# Altium PCB T962a.PcbDoc
Units mil, origin at the board's own origin, x right, y up, seen from the top; angles counter-clockwise.
Board outline 3661.42 x 2757.03 mil, 2 copper layers (Top Layer, Bottom Layer); 75 components, 73 nets, 290 pads, 117 vias.
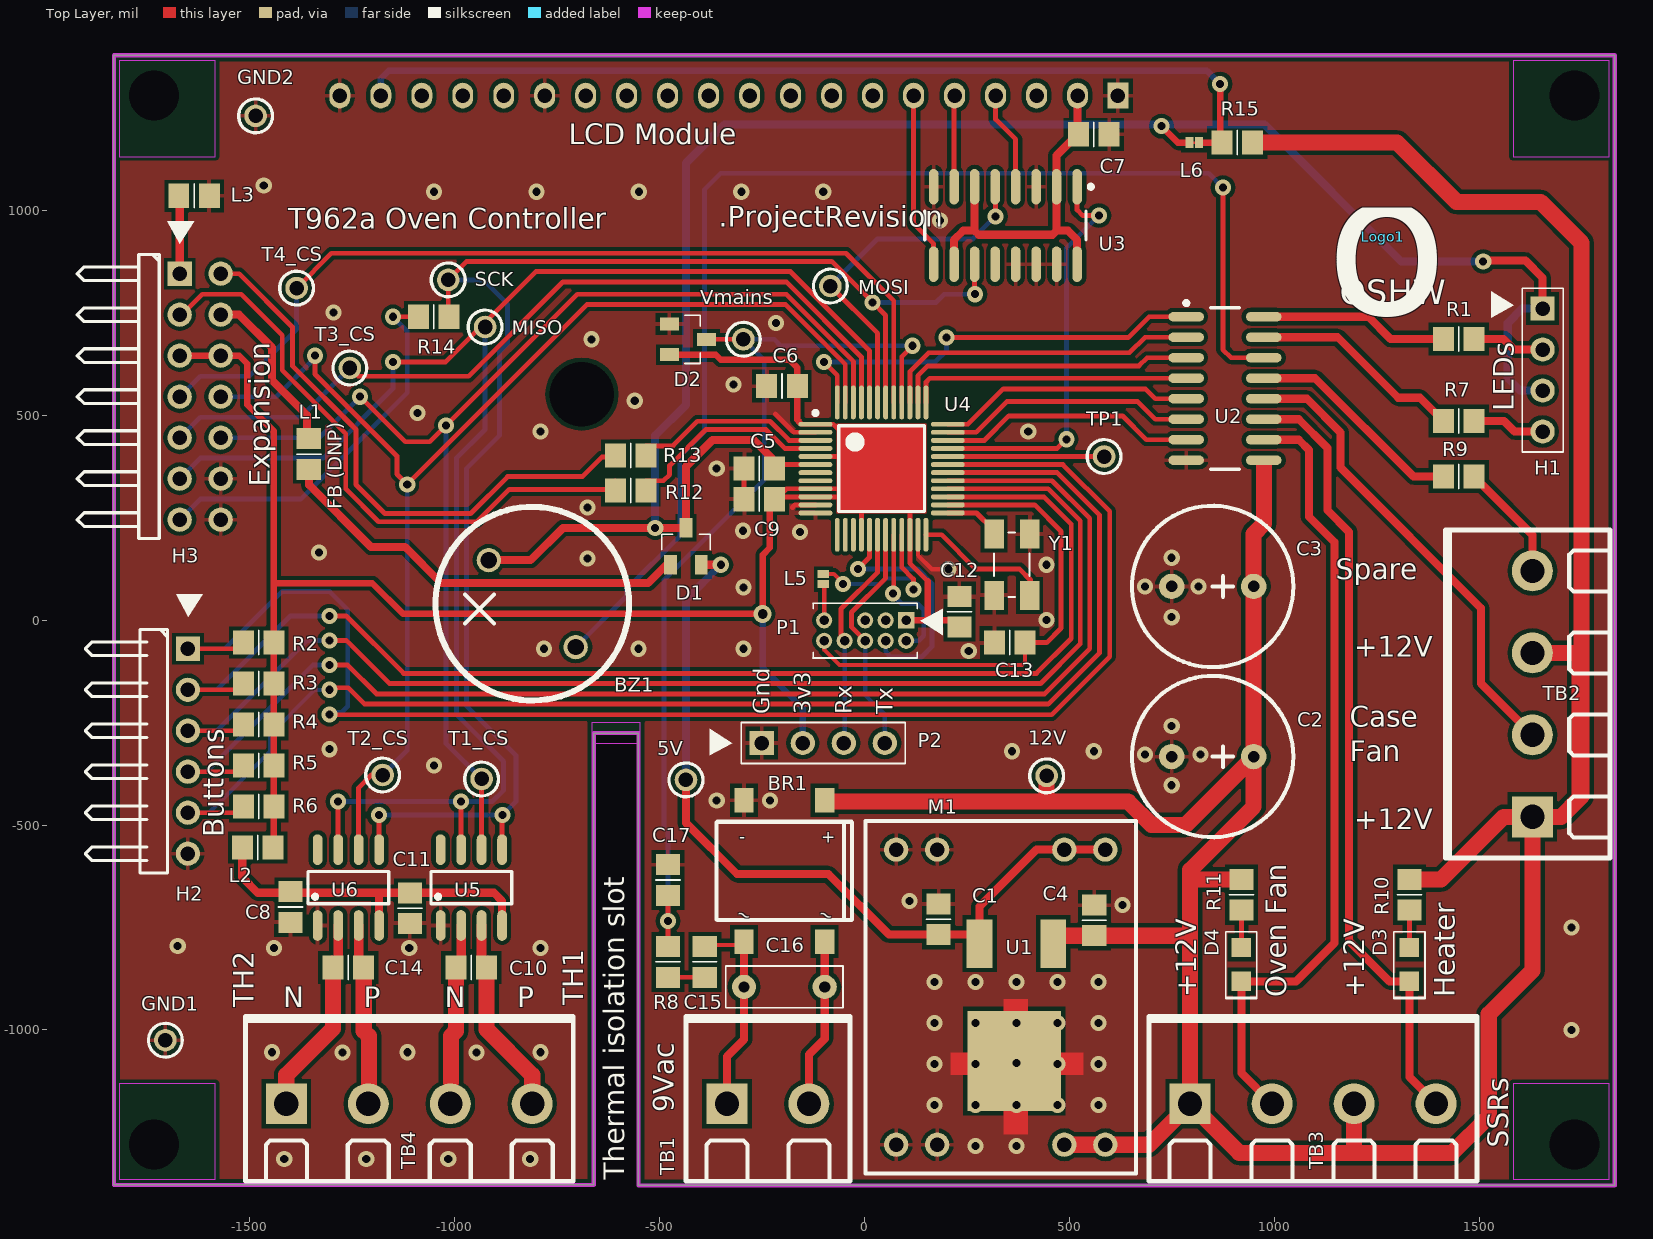
[diagram p0: Top Layer view]
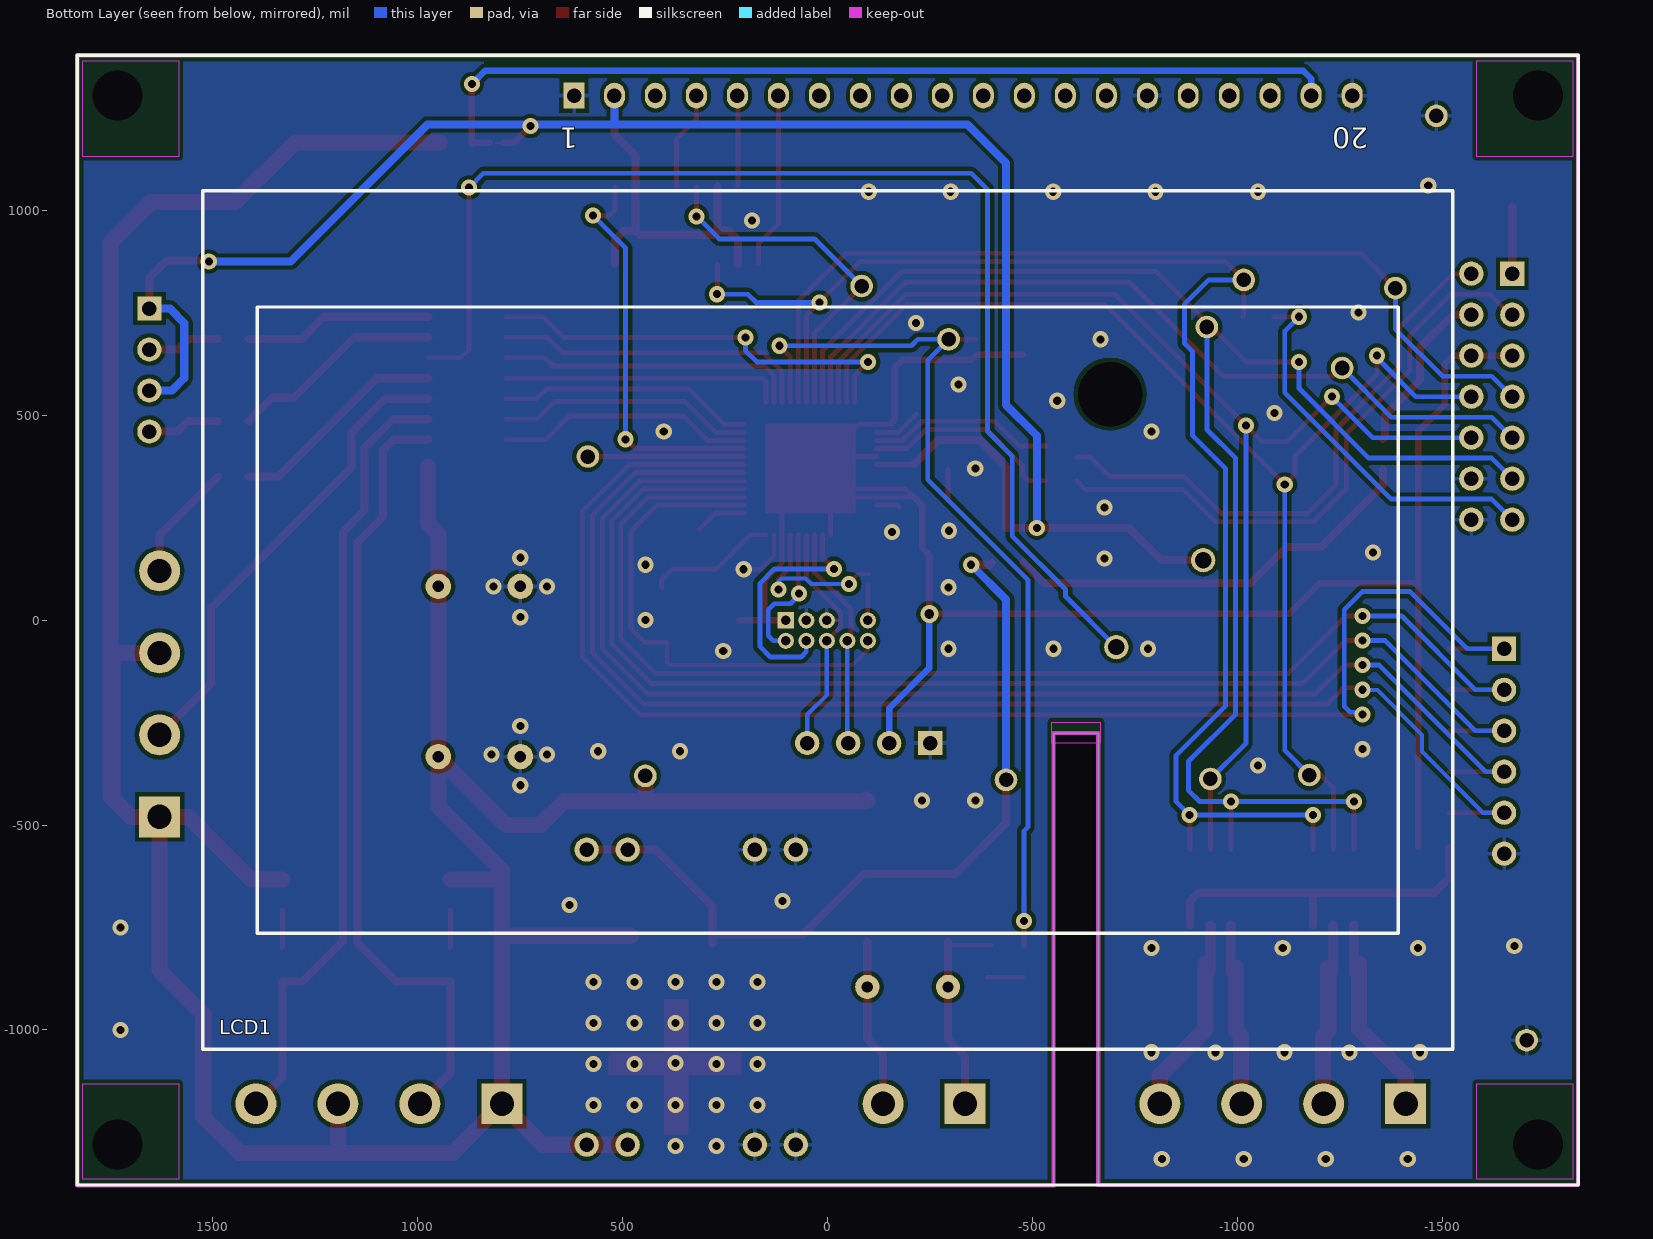
[diagram p1: Bottom Layer view, seen from below]
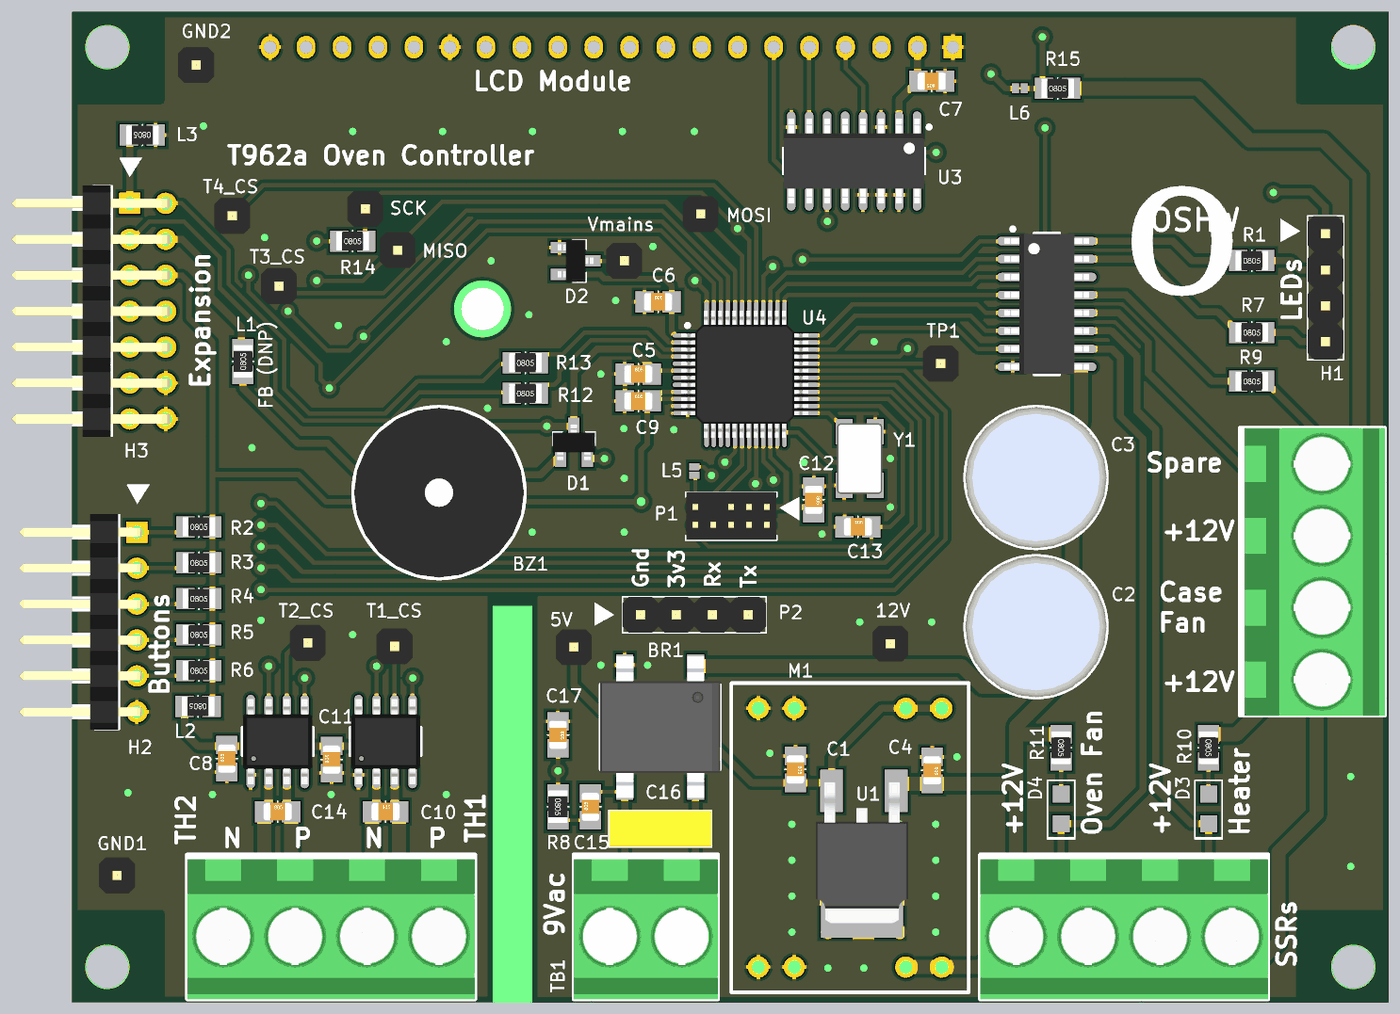
[diagram p2: 3D render of the assembled board from above, using the file's embedded part models]

## Layer stack, top to bottom
Top Solder: solder mask 0.4, Solder Resist, Dk 3.5
Top Layer: signal copper 1.4
Dielectric 1: dielectric 12.6, FR-4, Dk 4.8
Bottom Layer: signal copper 1.4
Bottom Solder: solder mask 0.4, Solder Resist, Dk 3.5

## Board outline
-1830.51,-1377.97 -1830.51,1377.94 1830.91,1377.94 1830.91,-1379.09 -551.18,-1379.09 -551.18,-275.59 -660,-275.59 -660,-1377.97

## Design rules (kind name [scope] priority, off if disabled: settings)
Clearance Clearance_Poly [InPoly] p1: gap=10
Clearance [All] p2: gap=7
HoleSize [All] p1: absolutevalues=TRUE maxlimit=99999 minlimit=1 maxpercent=80.000 minpercent=20.000
MinimumSolderMaskSliver [All] p1 off: minsoldermaskwidth=3.94
PlaneConnect PlaneConnect_Poly [IsVia] p1: planeconnectstyle=Direct reliefexpansion=20 reliefentries=4 reliefconductorwidth=10 reliefairgap=10
PlaneConnect [All] p2: planeconnectstyle=Relief reliefexpansion=20 reliefentries=4 reliefconductorwidth=10 reliefairgap=10
PolygonConnect PolygonConnect_Poly [IsVia] p1: connectstyle=Direct reliefconductorwidth=10 reliefentries=4 polygonreliefangle="90 Angle" airgapwidth=10
PolygonConnect [All] p2: connectstyle=Relief reliefconductorwidth=10 reliefentries=4 polygonreliefangle="90 Angle" airgapwidth=10
RoomDefinition T962a-P1 [InComponentClass('T962a-P1')] p1: confinementstyle=ConfineIn formatcopy=TRUE lockcomponents=FALSE outline -2013,-1417.34 2015,-1417.34 2015,1505.89 -2013,1505.89
RoutingVias [All] p1: holewidth=28 width=50 viastyle="Through Hole" minholewidth=28 minwidth=50 maxholewidth=28 maxwidth=50
SilkToBoardRegionClearance [All] p1 off:
SilkToSilkClearance [All] p1: silktosilkclearance=5
SilkToSolderMaskClearance [IsPad] p1: minsilkscreentomaskgap=7.87 clearancetoexposedcopper=TRUE
SolderMaskExpansion [All] p1: expansion=4
Width [All] p1: maxlimit=40 minlimit=10 preferedwidth=10
24 further rules are at their usual default settings.

## Components (designator, comment, footprint, x,y, rotation, side; value= is the part's Value field where it differs from the comment)
5V "TP" "PCBPIN - 0.9mm" -435,-390 r0 top
12V "TP" "PCBPIN - 0.9mm" 445,-380 r0 top
BR1 "DF10S" BRIDGE-SMT -195,-612 r0 top
BZ1 "Buzzer_PCB" BUZZER_SMALL -810,40 r135 top
C1 "4u7/10V" CCNP2012-0805 181.26,-730.08 r270 top
C2 "470uF/25V" RB5/10x13mm 950,-333 r180 top
C3 "470uF/25V" RB5/10x13mm 950,82 r180 top
C4 "100nF" CCNP2012-0805 561.26,-732.68 r270 top
C5 "100nF" CCNP2012-0805 -255.81,370 r0 top
C6 "2u2F" CCNP2012-0805 -200.79,570.87 r0 top
C7 "100nF" CCNP2012-0805 560,1185 r180 top
C8 "100nF" CCNP2012-0805 -1400,-700 r90 top
C9 "2u2F/6V" CCNP2012-0805 -255.81,295 r0 top
C10 "10nF" CCNP2012-0805 -958.58,-847.66 r0 top
C11 "100nF" CCNP2012-0805 -1108.58,-702.66 r90 top
C12 "100nF" CCNP2012-0805 232,20 r270 top
C13 "100nF" CCNP2012-0805 355,-55 r0 top
C14 "10nF" CCNP2012-0805 -1258.58,-847.66 r0 top
C15 "100nF" CCNP2012-0805 -389,-834 r90 top
C16 "100nF/63Vac" "CAP - SMALL MKT" -195,-895 r0 top
C17 "1nF" CCNP2012-0805 -479,-634 r270 top
D1 "PMEG2005CT" SOT23 -435,180 r0 top
D2 "BAT54S" SOT23 -430,685 r270 top
D3 "LED Red" LED-SMT-2 1330,-840 r270 top
D4 "LED Red" LED-SMT-2 920,-840 r270 top
GND1 "TP" "PCBPIN - 0.9MM" -1705,-1025 r90 top
GND2 "TP" "PCBPIN - 0.9MM" -1485,1230 r90 top
H1 "Header 1x4" HDR1X4S 1655,760 r270 top
H2 "Keyboard" HDR1X6H -1650,-70 r270 top
H3 "2x5 Header" HDR2X7H -1670,845 r270 top
L1 "FB (DNP)" CR2012-0805 -1355,405 r90 top
L2 "FB" CR2012-0805 -1480,-555 r180 top
L3 "FB" CR2012-0805 -1635,1035 r180 top
L5 "LinkOpen" SolderBridge(Open) -100,100 r90 top net-tie
L6 "LinkClosed" SolderBridge(Closed) 805,1165 r180 top net-tie
LCD1 "LCD-XC-4617" LCD_XC-4617 0,0 r0 bottom locked
Logo1 "OSHW Logo" OSHW 1265,935 r0 top
M1 "IT-IM130731001" IT-IM130731001 333,-920 r90 top
MISO "TP" "PCBPIN - 0.9mm" -925,715 r0 top
MOSI "TP" "PCBPIN - 0.9mm" -82.68,814.96 r0 top
P1 "SWD2X5" SWD-2X5 102.32,-0.49 r180 top
P2 "Header 1x4" HDR1X4S -250,-300 r0 top
R1 "390R" CR2012-0805 1450,685.79 r0 top
R2 "4K7" CR2012-0805 -1477.6,-55 r0 top
R3 "4K7" CR2012-0805 -1477.6,-155 r0 top
R4 "4K7" CR2012-0805 -1477.6,-255 r0 top
R5 "4K7" CR2012-0805 -1477.6,-355 r0 top
R6 "4K7" CR2012-0805 -1477.6,-455 r0 top
R7 "390R" CR2012-0805 1450,485.79 r0 top
R8 "47K" CR2012-0805 -479,-834 r270 top
R9 "DNP" CR2012-0805 1450,350 r0 top
R10 "10K" CR2012-0805 1330,-670 r270 top
R11 "10K" CR2012-0805 920,-670 r270 top
R12 "33R" CR2012-0805 -570,316.38 r0 top
R13 "33R" CR2012-0805 -570,401.38 r0 top
R14 "85R" CR2012-0805 -1050,740 r0 top
R15 "1K" CR2012-0805 910,1165 r0 top
SCK "TP" "PCBPIN - 0.9mm" -1015,830 r0 top
T1_CS "TP" "PCBPIN - 0.9mm" -933.58,-387.66 r0 top
T2_CS "TP" "PCBPIN - 0.9mm" -1175,-378 r90 top
T3_CS "TP" "PCBPIN - 0.9mm" -1255,615 r90 top
T4_CS "TP" "PCBPIN - 0.9mm" -1385,810 r90 top
TB1 "Terminal2" MOLEX-39544-3002 -335,-1180 r270 top
TB2 "Terminal4" MOLEX-39544-3004 1630,-480 r0 top
TB3 "Terminal4" MOLEX-39544-3004 795,-1180 r270 top
TB4 "Terminal4" MOLEX-39544-3004 -1410,-1180 r270 top
TP1 "TP" "PCBPIN - 0.9MM" 585,399.04 r0 top
U1 "NCP5501DT50RKG" TO-252 371.26,-932.68 r180 top
U2 "ULN2003ADR" SO-16_N 880,565 r0 top
U3 "74HCT157N" SO-16_N 344.28,962.73 r270 top
U4 "MK22DX256VLF5" TSQFP50P900X900-48M 42.32,369.51 r0 top (schematic designator U?)
U5 "MAX31855KASA+T" SO-8_L -958.58,-652.66 r90 top
U6 "MAX31855KASA+T" SO-8_L -1258.58,-652.66 r90 top
Vmains "TP" "PCBPIN - 0.9mm" -295,685 r0 top
Y1 "ABM3B-8.000MHZ-B2-T" "CRYSTAL_SMT - ABM3B" 360,135 r90 top

## Footprints (in the part's own frame and the unit in brackets; to place one, negate y for a bottom-side part, rotate by r counter-clockwise, add the part's x,y. Pads: shape width x height; smd on the part's side, far side on the other; paste and mask are expansions set on the pad)
BRIDGE-SMT [mm] "Bridge rectifier SMT"
  rect 1.2x1.52 smd: 1(2.5,4.375) 2(-2.5,4.375) 3(-2.5,-4.375) 4(2.5,-4.375)
  silkscreen extent -4.2,-3.05 4.2,3.05, body extent -4.24,-5.01 4.26,4.99, height 2.93
BUZZER_SMALL [mm] "BUZZER -  Adafruit"
  round 1.5 hole 1: 1(-3.81,0) 2(3.81,0)
  silkscreen extent -6,-6 6,6, body extent -5.99,-6 5.99,6, height 10
"CAP - SMALL MKT" [mm] "MKT Polyester block capacitor"
  round 1.5 hole 0.7: 1(-2.5,0) 2(2.5,0)
  silkscreen extent -3.63,-1.3 3.63,1.3, body extent -3.6,-1.25 3.6,1.25, height 6.5
CCNP2012-0805 [mm]
  rect 1.3x1.5 smd: 1(-0.95,0) 2(0.95,0)
  silkscreen extent 0,-0.75 0,0.75, body extent -1,-0.62 1,0.63, height 0.78
CR2012-0805 [mm]
  rect 1.3x1.5 smd: 1(-0.95,0) 2(0.95,0)
  silkscreen extent 0,-0.75 0,0.75, body extent -1.15,-0.67 1.15,0.68, height 0.76
"CRYSTAL_SMT - ABM3B" [mm] "Crystal SMT low profile (5.0 x 3.2 mm)"
  rect 1.8x1.2 smd: 1(-1.9,-1.1) 2(1.9,-1.1) 3(1.9,1.1) 4(-1.9,1.1)
  silkscreen extent -2,-1.1 2,1.1, body extent -2.51,-1.59 2.49,1.61, height 1.15
HDR1X4S [mm] "Connector; Header; 5 Position; Straight"
  rect 1.5x1.5 hole 0.9: 1(0,0)
  round 1.5 hole 0.9: 2(2.54,0) 3(5.08,0) 4(7.62,0)
  silkscreen extent -1.27,-3.18 8.89,1.27, body extent -1.27,-1.27 8.89,1.27, height 6
HDR1X6H [mm] "Connector; Header; 6 Position; Right Angle"
  rect 1.5x1.5 hole 0.9: 1(0,0)
  round 1.5 hole 0.9: 2(2.54,0) 3(5.08,0) 4(7.62,0) 5(10.16,0) 6(12.7,0)
  silkscreen extent -3.38,-6.35 13.89,0.91, body extent -1.27,-8.3 13.97,0.33, height 2.54
HDR2X7H [mm] "Connector; Header; 2x7 Position; Right Angle"
  rect 1.5x1.5 hole 0.9: 1(0,0)
  round 1.5 hole 0.9: 2(0,2.54) 3(2.54,0) 4(2.54,2.54) 5(5.08,0) 6(5.08,2.54) 7(7.62,0) 8(7.62,2.54) 9(10.16,0) 10(10.16,2.54) 11(12.7,0) 12(12.7,2.54) 13(15.24,0) 14(15.24,2.54)
  silkscreen extent -3.24,-6.35 16.41,0.89, body extent -1.27,-8.33 16.51,2.84, height 5.08
IT-IM130731001 [mm] "Buck Converter module"
  round 1.5 hole 0.9: IN0+(-9.144,-3.937) IN0-(-9.144,6.477) IN1+(-9.144,-6.477) IN1-(-9.144,3.937) OUT0+(9.144,-3.937) OUT0-(9.144,6.477) OUT1+(9.144,-6.477) OUT1-(9.144,3.937)
  silkscreen extent -10.92,-8.38 10.92,8.38, body extent -10.92,-8.38 10.92,8.38, height 6
LCD_XC-4617 [mm] "Duinotech XC-4617 128 x 64 LCD"
  round 3 hole 4: 0(-17.5,-14)
  rect 1.3x1.6 hole 0.9: 1(15.72,-32.5)
  oval 1.3x1.6 hole 0.9: 2(13.22,-32.5) 3(10.68,-32.5) 4(8.14,-32.5) 5(5.6,-32.5) 6(3.06,-32.5) 7(0.52,-32.5) 8(-2.02,-32.5) 9(-4.56,-32.5) 10(-7.1,-32.5) 11(-9.64,-32.5) 12(-12.18,-32.5) 13(-14.72,-32.5) 14(-17.26,-32.5) 15(-19.8,-32.5) 16(-22.34,-32.5) 17(-24.88,-32.5) 18(-27.42,-32.5) 19(-29.96,-32.5) 20(-32.5,-32.5)
  round 3 hole 3.1: 21(-44,-32.5) 22(44,-32.5) 23(44,32.5) 24(-44,32.5)
  silkscreen extent -46.5,-35 46.5,35, body extent -46.5,-35 46.5,35, height 11.3
LED-SMT-2 [mm] "Medium SMT LED HSMx-C170 (0805)"
  rect 1.2x1.2 smd: A(-1.05,0) K(1.05,0)
  silkscreen extent -2.03,-0.96 2.13,0.96, body extent -1.78,-0.76 1.78,0.76, height 1
MOLEX-39544-3002 [mm] "Wire-To-Board Terminal Block"
  rect 2.54x2.54 hole 1.5: 1(0,0)
  round 2.54 hole 1.5: 2(0,5.08)
  silkscreen extent -5.4,-2.54 4.83,7.62, body extent -5.08,-2.54 4.83,7.62, height 14.6
MOLEX-39544-3004 [mm] "Wire-To-Board Terminal Block"
  rect 2.54x2.54 hole 1.5: 1(0,0)
  round 2.54 hole 1.5: 2(0,5.08) 3(0,10.16) 4(0,15.24)
  silkscreen extent -5.4,-2.54 4.83,17.78, body extent -5.08,-2.54 4.83,17.78, height 14.6
OSHW [mil] "OSHW Logo"
"PCBPIN - 0.9mm" [mm]
  round 1.4 hole 0.9: 1(0,0)
  silkscreen extent -1.05,-1.05 1.05,1.05, body extent -1.27,-1.27 1.27,1.27, height 6
"PCBPIN - 0.9MM" [mm]
  round 1.4 hole 0.9: 1(0,0)
  silkscreen extent -1.05,-1.05 1.05,1.05, body extent -1.27,-1.27 1.27,1.27, height 6
RB5/10x13mm [mil]
  round 62 hole 28: 1(0,0) 2(200,0)
  silkscreen extent -97,-197 297,197, body extent -97,-197 297,197, height 512
SO-8_L [mm] "8-Pin Small Outline Integrated Circuit 1.27 mm Pitch, IPC High Density"
  oval 1.9x0.6 smd: 1(-2.35,1.905) 2(-2.35,0.635) 3(-2.35,-0.635) 4(-2.35,-1.905) 5(2.35,-1.905) 6(2.35,-0.635) 7(2.35,0.635) 8(2.35,1.905)
  silkscreen extent -1,-2.5 1,2.5, body extent -3,-2.45 3,2.45, height 1.7
SO-16_N [mm] "16-Pin Small Outline Integrated Circuit 1.27 mm Pitch, IPC Medium Density"
  oval 2.2x0.6 smd: 1(-2.4,4.445) 2(-2.4,3.175) 3(-2.4,1.905) 4(-2.4,0.635) 5(-2.4,-0.635) 6(-2.4,-1.905) 7(-2.4,-3.175) 8(-2.4,-4.445) 9(2.4,-4.445) 10(2.4,-3.175) 11(2.4,-1.905) 12(2.4,-0.635) 13(2.4,0.635) 14(2.4,1.905) 15(2.4,3.175) 16(2.4,4.445)
  silkscreen extent -2.52,-5 0.9,5.42, body extent -3,-4.95 3,4.95, height 1.4
SolderBridge(Closed) [mm]
  rect 0.5x0.7 smd: 1(-0.305,0) 2(0.305,0)
  Top Layer region: -0.152,-0.076 0.152,-0.076 0.152,0.076 -0.152,0.076
SolderBridge(Open) [mm]
  rect 0.5x0.7 smd: 1(-0.305,0) 2(0.305,0)
SOT23 [mm] "SOT-23; 3 Leads; Body 3.0 x 2.3 mm, inc. leads (LxW max)"
  rect 0.8x1.2 smd: 1(-0.95,-1.15) 2(0.95,-1.15) 3(0,1.15)
  silkscreen extent -1.5,-0.2 1.5,0.75, body extent -1.5,-1.25 1.5,1.25, height 1.05
SWD-2X5 [mm] "Connector; SWD; 2x5 Position"
  rect 1x1 hole 0.6: 1(0,0)
  round 1 hole 0.6: 2(0,1.27) 3(1.27,0) 4(1.27,1.27) 5(2.54,0) 6(2.54,1.27) 8(3.81,1.27) 9(5.08,0) 10(5.08,1.27)
  silkscreen extent -2.27,-1.06 5.77,2.33, body extent -0.63,-1.09 5.72,2.31, height 4.5
TO-252 [mm] "TO-252 Package"
  rect 1.6x3 smd: 1(-2.285,-3.64) 3(2.285,-3.64)
  rect 5.8x6.2 smd: 4(0.127,3.64)
  body extent -3.14,-4.23 3.4,5.71, height 2.29
TSQFP50P900X900-48M [mm] "Thin QFP, 48-Leads, Body 7x7mm, Pitch 0.5mm, IPC Low Density"
  oval 2.1x0.3 smd: 1(-4.1,2.75) 2(-4.1,2.25) 3(-4.1,1.75) 4(-4.1,1.25) 5(-4.1,0.75) 6(-4.1,0.25) 7(-4.1,-0.25) 8(-4.1,-0.75) 9(-4.1,-1.25) 10(-4.1,-1.75) 11(-4.1,-2.25) 12(-4.1,-2.75) 25(4.1,-2.75) 26(4.1,-2.25) 27(4.1,-1.75) 28(4.1,-1.25) 29(4.1,-0.75) 30(4.1,-0.25) 31(4.1,0.25) 32(4.1,0.75) 33(4.1,1.25) 34(4.1,1.75) 35(4.1,2.25) 36(4.1,2.75)
  oval 0.3x2.1 smd: 13(-2.75,-4.1) 14(-2.25,-4.1) 15(-1.75,-4.1) 16(-1.25,-4.1) 17(-0.75,-4.1) 18(-0.25,-4.1) 19(0.25,-4.1) 20(0.75,-4.1) 21(1.25,-4.1) 22(1.75,-4.1) 23(2.25,-4.1) 24(2.75,-4.1) 37(2.75,4.1) 38(2.25,4.1) 39(1.75,4.1) 40(1.25,4.1) 41(0.75,4.1) 42(0.25,4.1) 43(-0.25,4.1) 44(-0.75,4.1) 45(-1.25,4.1) 46(-1.75,4.1) 47(-2.25,4.1) 48(-2.75,4.1)
  silkscreen extent -4.22,-2.65 2.65,3.57, body extent -4.55,-4.5 4.45,4.5, height 1.6

## Part data
5V 12V GND1 GND2 MISO MOSI SCK T1_CS T2_CS T3_CS T4_CS TP1 Vmains: "Test Point"
BR1: "bRIDGE rECTIFIER"
BZ1: "Buzzer (Adafruit 1536)"
C1 C8 C10 C11 C13 C14: library part Cap_CCNP_0805, "Capacitor SMT 0805"
C2 C3: library part Cap-25ZLS470MEFC10X12, "Polarized Capacitor"
C4 C5 C6 C7 C9 C12 C15 C16 C17: library part Cap, "Capacitor"
D1: "Dual Schottky Diode (SMT)"
D2: "Dual Diode (SMT)"
D3 D4: library part "LED SMT,Red", "LED (Red SMT)"
H1 P2: "Header, 5-Pin, Right Angle"
H2: library part "Header 6", "Header, 6-Pin"
H3: library part "Header 2x7H", "Header 2x7"
L1 L2 L3: library part "Ferrite Bead 0805", "Ferrite Bead (0805) 0.045OHM, 2A"
LCD1: "LCD 128 x 64 pixel, ST7920 controller & contrast pot (Jaycar XC-4617)"
M1: "Itead Buck converter"
P1: "SWD Connector 2x5-Pin"
R1 R2 R3 R4 R5 R6 R7 R8 R9 R10 R11 R12 R13 R14 R15: library part Res_CR0805, "Resistor"
TB1: "MULTICOMP  MC24366 Wire-To-Board Terminal Block"
TB2 TB3 TB4: "MULTICOMP MC24368 Wire-To-Board Terminal Block"
U1: "Fixed LDO Voltage Regulator, 2.5V-16V in, 230mV Dropout, 5V/500mA out, TO-252-3"
U3: "Quad 2-1 Multiplexor"
U4: "Arm Cortex M4"
Y1: "Crystal 8MHz (MINIATURE SMT ABM3B)"

## Via types
v1: diameter 39.37, hole 19.68, Top Layer to Bottom Layer, tented both sides, 116 vias
v2: diameter 43.31, hole 23.62, Top Layer to Bottom Layer, tented both sides, 1 vias

## Nets (pads, with @x,y where several pads share a name; then routed paths per layer and width w, separated by ;. In a path a pad name is that pad's centre, name@x,y a point inside that pad or via, vN(x,y) a via of type N, cw(c..) or ccw(c..) an arc to the next point about the centre after c; other vN are vias at no path point)
3V3: C6.2 C9.2 C12.2 D2.2 H3.5 H3.6 L2.1 P1.1 P2.2 R2.2 R3.2 R4.2 R5.2 R6.2 U4.1 U4.5 U4.9 U4.10 U4.16 U4.22 | length 4867.5
  Top Layer w11.81: -158.08,483.08 -152.78,477.78 U4.1 ; U4.5 -18.15,399.04 ; U4.1@-119.09,477.69 -75.69,477.69 -37.47,439.47 ; -26.89,320.3 U4.9 -189.49,320.3 -209.17,300.61 U4.10 -24.39,300.61 ; U4.16 -6.89,293.11 ; 111.22,318.41 U4.22 111.22,138.78 154.92,95.08
  Top Layer w15.75: H3.5 H3.6 -1525,645 -1505,625 -1505,525 -1440.2,460.2 -1440.2,90 ; L2.1@-1440.2,-552.6 R6.2 R5.2 R4.2 R3.2 R2.2 -1440.2,90 ; D2.2 -362.6,647.6 -350,635 -182.24,635 -163.39,616.14 C6.2 -163.39,488.39 -158.08,483.08 ; C9.2@-209.17,300.61 -230.51,279.28 -230.51,176.4 -248,158.91 v2(-248,15) -1125,15 -1200,90 -1440.2,90 ; P1.1 C12.2@215.09,-0.49 ; 154.92,0 154.92,95.08
  Bottom Layer w15.75: v2(-248,15) -248,-117 -150,-215 P2.2
5V: BZ1.2 C5.2 C7.2 D1.3 H1.1 H1.3 L6.2 LCD1.2 U3.2 U3.6 U3.10 U3.16 U4.6 | length 5689.1
  Top Layer w11.81: C5.2@-200.24,379.35 U4.6
  Top Layer w15.75: v1(725,1205) 765,1165 L6.2
  Top Layer w19.68: BZ1.2 -813.93,146.07 -735,225 v1(-510,225) D1.3@-435.28,225 ; D1.3 -435,375 -370.49,439.51 -269.51,439.51 C5.2@-210.28,380.28 ; U3.10 219.28,927.73 241.54,950 269.28,950 ; U3.6 269.28,950 ; U3.16 519.28,927.73 497.01,950 469.28,950 ; LCD1.2 520.47,1184.79 469.28,1133.59 U3.2 469.28,950 ; v1(1510,875) 1512,877 1613,877 1655,835 ; 269.28,950 279.28,940 459.28,940 469.28,950
  Top Layer w20: H1.1 1655,835
  Bottom Layer w19.68: v1(-510,225) -510,450 -435,525 -435,1115 -341.1,1208.9 976.1,1208.9 1310,875 v1(1510,875) ; 520.47,1212.37 LCD1.2
  Bottom Layer w20: H1.3 1600,560 1570,590 1570,725 1605,760 H1.1
5VSUP: 5V.1 C1.2 D1.2 M1.OUT0+ M1.OUT1+ U1.3 | length 2001.2
  Top Layer w19.68: 5V.1 -435,-495 -310,-620 -87.48,-620 60,-767.48 C1.2 U1.3@271.26,-767.48 ; D1.2@-400.28,139.24 -396.04,135 v1(-350,135) ; U1.3 281.3,-698.7 420,-560 495,-560 M1.OUT1+
  Bottom Layer w19.68: 5V.1@-435,-400 -435,50 v1(-350,135)
12V: 12V.1 BR1.1 C2.1 C3.1 C4.2 M1.IN0+ M1.IN1+ R10.1 R11.1 R15.2 TB2.1 TB2.3 TB3.1 TB3.3 U1.1 U2.9 | length 8525.6
  Top Layer w39.37: BR1.1 BR1.1@-94.82,-438 ; BR1.1@-84.82,-443 644,-443 701,-500 784,-500 950,-334 950,-455 795,-610 TB3.1 ; 445,-436 12V.1@445,-385 ; U1.1@480.51,-770.08 C4.2 790,-770.08 ; M1.IN0+ 695,-1280 TB3.1 ; 800,-632.6 R11.1 ; R15.2 1300,1165 1445,1020 1650,1020 1750,920 1750,-430 1745,-435 ; C2.1 C3.1 950,210 975,235 975,375 ; TB3.3 1195,-1300 ; R10.1 1407.4,-632.6 1560,-480 TB2.1 ; TB2.3 1745,-80 1745,-435 ; TB3.1 915,-1300 1195,-1300 ; 1195,-1300 1435,-1300 1523.62,-1211.38 1523.62,-961.38 1630,-855 TB2.1 ; TB2.1 1700,-480 1745,-435
ADC0_DM0: U4.8
ADC0_DP0: U4.7
BUZZER: U2.3 U4.38 | length 737.8
  Top Layer w11.81: U4.38 130.91,595.91 155,620 670,620 690,640 U2.3
BUZZERB: BZ1.1 U2.14 | length 3044.9
  Top Layer w11.81: v1(875,1055) 875,660 895,640 U2.14
  Bottom Layer w11.81: BZ1.1 -580,57.87 -580,75 -450,205 -450,400 -390,460 -390,1050 -350,1090 840,1090 v1(875,1055)
CASEFAN: U2.5 U4.36 | length 627.4
  Top Layer w11.81: U4.36 252.78,477.78 339,564 686,564 710,540 U2.5
CASEFANB: TB2.2 U2.12 | length 1153.3
  Top Layer w19.68: U2.12 1080,540 1162,458 1162,372 1505,29 1505,-155 TB2.2
EXTAL: U4.24 Y1.1 | length 318.8
  Top Layer w11.81: U4.24 188.74,208.09 272.32,124.51 378.92,124.51 405.63,97.81 Y1.1@405.63,79.71
EXTAL33: U4.15
EZP_CSB: L5.2 U4.21 | length 403.6
  Top Layer w10: L5.2 -74.38,112 -52,89.62 v1(-52,88)
  Top Layer w11.81: U4.21 91.54,128.46 120,100 v1(120,75)
  Bottom Layer w10: v1(-52,88) 40.19,88 53.88,101.69 112.31,101.69 120,94 v1(120,75)
EZP_CSLB: L5.1 P1.9 | length 88.5
  Top Layer w10: P1.9 L5.1@-97.68,88
FANLED: U2.2 U4.39 | length 784.3
  Top Layer w11.81: U4.39 111.22,606.22 157,652 647,652 685,690 U2.2
FANLEDB: R7.1 U2.15 | length 522.7
  Top Layer w19.68: U2.15 1155,690 1302.61,542.39 1356,542.39 R7.1
FANLEDR: H1.4 R7.2 | length 178.3
  Top Layer w19.68: R7.2 1560.79,485.79 1586.58,460 H1.4
GND: BR1.2 C1.1 C2.2 C3.2 C4.1 C5.1 C6.1 C7.1 C8.1 C9.1 C11.1 C12.1 C13.1 C17.1 D2.1 GND1.1 GND2.1 H2.6 H3.12 H3.14 L3.1 LCD1.1 LCD1.15 LCD1.20 M1.IN0- M1.IN1- M1.OUT0- M1.OUT1- P1.3 P1.5 P2.1 U1.4 U2.8 U3.3 U3.8 U3.13 U3.14 U3.15 U4.2 U4.11 U4.12 U4.23 U5.1 U6.1 Y1.2 Y1.4 | length 388.1
  Top Layer w10: U4.23 130.91,158.09 165,124 v1(205,124)
  Top Layer w11.81: C9.1@-293.4,293 C5.1@-293.4,368 ; -217,503 -172.09,458.09 U4.2 ; -175,275 -169.07,280.93 U4.11
  other v1: -1415,-1315 -1215,-1315 -1015,-1315 -815,-1315 271.26,-1282.68 371.26,-1282.68 171.26,-1182.68 271.26,-1182.68 371.26,-1182.68 471.26,-1182.68 571.26,-1182.68 171.26,-1082.68 271.26,-1082.68 471.26,-1082.68 571.26,-1082.68 371.26,-1080.98 -1272.6,-1055.12 -945.83,-1055.12 -1445,-1054.37 -1114,-1054.37 -790,-1054.37 1725,-1000 171.26,-982.68 271.26,-982.68 371.26,-982.68 471.26,-982.68 571.26,-982.68 171.26,-882.68 271.26,-882.68 371.26,-882.68 471.26,-882.68 571.26,-882.68 -1440,-800 -1110,-800 -790,-800 -1675,-795 1725,-750 630,-695 110,-685 -360,-440 -230,-440 750,-403 -1050,-355 685,-328 820,-328 360,-320 560,-320 -1305,-315 750,-258 255,-75 -781,-70 -551,-70 -295,-70 445,0 750,7 -295,80 685,82 815,82 445,135 -675,150 750,152 -1330,165 -157,215 -296,218 -675,275 -360,370 -790,460 400,460 -1090,505 -560,535 -318.9,574.8 -665,685 -215,725 -1295,750 185,975 -1050,1045 -800,1045 -550,1045 -300,1045 -100,1045 -1465,1060
HEATER: U2.6 U4.35 | length 630.6
  Top Layer w11.81: U4.35 273.09,458.09 348,533 667,533 710,490 U2.6
HEATERB: D3.K TB3.4 U2.11 | length 1922.8
  Top Layer w19.68: U2.11 1060,490 1130,420 1130,268 1183,215 1183,-783 1281.34,-881.34 D3.K 1330,-1115 TB3.4
HEATERLED: U2.1 U4.48 | length 1066.1
  Top Layer w11.81: v1(-98.43,629.92) -65.94,597.44 U4.48 ; v1@200.79,685 v1@204.76,688.98 ; v1(200.79,688.98) v1@204.76,688.98 ; U2.1 695,740 643.98,688.98 v1@204.76,688.98
  Bottom Layer w11.81: v1(-98.43,629.92) 173.23,629.92 200.79,657.48 v1(200.79,688.98)
HEATERLEDB: R1.1 U2.16 | length 460.6
  Top Layer w19.68: U2.16 1230,740 1284.21,685.79 R1.1
HEATERLEDR: H1.2 R1.2 | length 178.3
  Top Layer w19.68: R1.2 1559.21,685.79 1585,660 H1.2
L_CS*: U3.1 U4.33 | length 992.3
  Top Layer w11.81: U4.33 470.72,418.72 v1(493,441) ; U3.1 519.28,1000.73 533.28,986.73 v1(572.28,986.73)
  Bottom Layer w11.81: v1(493,441) 493,907.46 v1(572.28,986.73)
L_CSB: LCD1.4 U3.4 | length 242.5
  Top Layer w11.81: LCD1.4 320.47,1221.54 369.28,1172.73 U3.4
MISO: H3.11 MISO.1 U4.44 U5.7 U6.7 | length 4002.8
  Top Layer w11.81: U6.7 v1(-1283.58,-442.66) ; v1(-1150,630) -1021,630 -801,850 -180,850 12.8,657.2 U4.44 ; U5.7 v1(-983.58,-442.66)
  Bottom Layer w11.81: H3.11 -1620,395 -1320,395 -1150,565 v1(-1150,630) ; v1(-1283.58,-442.66) v1(-983.58,-442.66) -907.66,-442.66 -880,-415 -880,-345 -995,-230 -995,395 -925,465 MISO.1 MISO.1@-925,725
MOSI: MOSI.1 U3.5 U4.43 | length 877.4
  Top Layer w11.81: MOSI.1 32.48,699.8 U4.43 ; U3.5 320,1056.5 v1(320,985)
  Bottom Layer w11.81: MOSI.1 32.36,930 265,930 v1(320,985)
MOSIB: LCD1.5 U3.7 | length 218.3
  Top Layer w11.81: U3.7 219.28,1273.8 LCD1.5@220.47,1275
NetBR1_3: BR1.3 C15.2 C16.1 TB1.1 | length 519.6
  Top Layer w10: C15.2@-400,-792.6 BR1.3@-293.43,-792.6
  Top Layer w20: TB1.1 -335,-1065 -293.43,-1023.43 -293.43,-792.6 BR1.3
NetBR1_4: BR1.4 C16.2 TB1.2 | length 411.7
  Top Layer w20: TB1.2 -135,-1060 -96.57,-1021.57 -96.57,-901.57 BR1.4
NetC15_1: C15.1 R8.2 | length 90
  Top Layer w10: R8.2 C15.1
NetD3_A: D3.A R10.2 | length 91.3
  Top Layer w11.81: D3.A R10.2
NetD4_A: D4.A R11.2 | length 91.3
  Top Layer w11.81: D4.A R11.2
NetH3_4: H3.4 L1.2 | length 418
  Top Layer w19.68: H3.4 -1525,745 -1445,665 -1445,585 -1360,500 -1360,447.4 L1.2
NetL6_1: L6.1 LCD1.19 R15.1 | length 2295.8
  Top Layer w15.75: L6.1@825,1165 R15.1@863.6,1165 ; R15.1@868,1160.6 v1(868,1308)
  Bottom Layer w15.75: LCD1.19 -1179.53,1320.47 -1160,1340 836,1340 v1(868,1308)
OVENFAN: U2.7 U4.34 | length 630.5
  Top Layer w11.81: U4.34 293.41,438.41 353,498 629.93,498 687.93,440 U2.7
OVENFANB: D4.K TB3.2 U2.10 | length 1944.9
  Top Layer w19.68: U2.10 1060,440 1085,415 1085,252 1147,190 1147,-788 1053.66,-881.34 D4.K 920,-1105 TB3.2
PTB17: TP1.1 U4.32 | length 381.3
  Top Layer w11.81: U4.32 TP1.1
RESETB: C13.2 P1.10 U4.26 | length 1219.9
  Top Layer w10: P1.10 -97.68,-72.32 -60,-110 385,-110 392.4,-102.6 C13.2
  Top Layer w11.81: U4.26 415.91,280.93 480,216.83 480,-20 445,-55 C13.2
SCK: R14.2 SCK.1 U3.11 U4.42 U5.5 U6.5 | length 3778
  Top Layer w11.81: U6.5 v1(-1183.58,-475.85) ; R14.2 -1015,742.4 SCK.1 -970,875 -79.72,875 v1(20.28,775) 52.17,743.11 U4.42 ; U5.5 v1@-883.58,-475.85 ; U3.11 269.28,795.72 v1(270,795) v1@279.28,785.72
  Bottom Layer w11.81: v1(-1183.58,-475.85) v1(-882.83,-475.85) -850,-443.01 -850,-330 -970,-210 -970,370 -890,450 -890,655 -870,675 -870,770 -930,830 SCK.1 ; v1(20.28,775) 174.94,775 194.94,795 v1(270,795)
SCKB: LCD1.6 U3.9 | length 432
  Top Layer w11.81: LCD1.6@120.47,1280 120.47,966.54 169.28,917.73 U3.9
SCKR: H3.13 R14.1 | length 950.5
  Top Layer w11.81: v1@-1155,740 v1(-1150,740) R14.1
  Bottom Layer w11.81: H3.13 -1620,295 -1375,295 -1115,555 -1115,705 v1(-1150,740)
SPARE: U2.4 U4.37 | length 688.5
  Top Layer w11.81: U4.37 150.59,580.59 160,590 U2.4
SPAREB: R9.1 U2.13 | length 537.5
  Top Layer w19.68: U2.13 1100,590 1340,350 R9.1
SPARER: R9.2 TB2.4 | length 289.1
  Top Layer w19.68: R9.2 1630,207.4 TB2.4
SW_F1: H2.5 R6.1 U4.30 | length 3326.9
  Top Layer w11.81: H2.5 R6.1@-1515,-470 ; v1@-1305,-165 -1259,-165 -1219,-205 449,-205 574,-80 574,256 470.33,359.67 U4.30
  Bottom Layer w10: H2.5 -1599.02,-470 -1450,-320.98 -1450,-280 -1341,-171 -1311,-171 v1@-1305,-165
  other v1: -1305,-170
SW_F2: H2.4 R5.1 U4.29 | length 3219.6
  Top Layer w11.81: H2.4 R5.1@-1515,-370 ; v1(-1305,-110) -1260,-110 -1190,-180 440,-180 550,-70 550,248 458.02,339.98 U4.29
  Bottom Layer w11.81: H2.4 -1605,-370 -1345,-110 v1(-1305,-110)
SW_F3: H2.3 R4.1 U4.28 | length 3142.5
  Top Layer w11.81: H2.3 R4.1@-1515,-270 ; v1(-1305,-50) -1263,-50 -1158,-155 430,-155 527,-58 527,242 448.7,320.3 U4.28
  Bottom Layer w11.81: H2.3 -1580,-270 -1360,-50 v1(-1305,-50)
SW_F4: H2.2 R3.1 U4.27 | length 3065.6
  Top Layer w11.81: H2.2 R3.1@-1515,-170 ; v1(-1305,10) -1264,10 -1124,-130 420,-130 505,-45 505,234 438.39,300.61 U4.27
  Bottom Layer w11.81: H2.2 -1580,-170 -1400,10 v1(-1305,10)
SW_S: H2.1 R2.1 U4.31 | length 3650.1
  Top Layer w11.81: H2.1 R2.1@-1515,-70 ; v1@-1305,-225 -1299,-231 457,-231 599,-89 599,265 484.65,379.35 U4.31
  Bottom Layer w11.81: H2.1 -1560,-70 -1420,70 -1305,70 -1260,25 -1260,-210.49 -1274.51,-225 v1@-1305,-225
  other v1: -1305,-230
SWD_CLK: P1.4 U4.17 | length 599.2
  Top Layer w11.81: v1(-15,125) 12.8,152.8 U4.17
  Bottom Layer w11.81: v1(-15,125) 130,125 165,90 165,-65 140,-90 65,-90 52.32,-77.32 P1.4
SWD_DIO: P1.2 U4.20 | length 358.2
  Top Layer w11.81: v1(70,65) 73.7,65 71.85,66.85 U4.20
  Bottom Layer w11.81: v1(70,65) 65.91,65 90.91,40 130,40 145,25 145,-38 132.51,-50.49 P1.2
SWD_RX: P1.8 P2.3 U4.18 | length 549
  Top Layer w11.81: P1.8 -57,-41.17 -57,27 32.48,116.48 U4.18
  Bottom Layer w10: P2.3@-47.68,-300 P1.8
SWD_TX: P1.6 P2.4 U4.19 | length 576.5
  Top Layer w11.81: P1.6 -31.52,-16.65 -31.52,18.48 52.17,102.17 U4.19
  Bottom Layer w10: P1.6 2.32,-182.32 50,-230 P2.4
T1+: C10.2 TB4.4 U5.3 | length 503.5
  Top Layer w23.62: C10.2@-933.58,-860.26 U5.3
  Top Layer w39.37: C10.2@-921.18,-837.66 -921.18,-998.82 -810,-1110 TB4.4
T1-: C10.1 TB4.3 U5.2 | length 399.6
  Top Layer w23.62: C10.1@-983.58,-860.26 U5.2
  Top Layer w39.37: -1008.58,-1127 -1008.58,-1015 -995.98,-1002.4 C10.1
T1_CS*: H3.10 T1_CS.1 U4.46 U5.6 | length 3018.8
  Top Layer w11.81: v1(-1230,545) -1120,435 -1060,435 v1(-1020,475) -700,795 -190,795 -26.57,631.57 U4.46 ; U5.6 T1_CS.1
  Bottom Layer w11.81: H3.10 -1330,445 v1(-1230,545) ; v1(-1020,475) -1020,-301.24 T1_CS.1
T2+: C14.2 TB4.2 U6.3 | length 452.6
  Top Layer w23.62: C14.2@-1233.58,-860.26 U6.3
  Top Layer w39.37: C14.2 -1221.18,-1002.4 -1208.58,-1015 TB4.2@-1208.58,-1180
T2-: C14.1 TB4.1 U6.2 | length 504.6
  Top Layer w23.62: C14.1@-1283.58,-860.26 U6.2
  Top Layer w39.37: TB4.1 -1410,-1110 -1295.98,-995.98 C14.1@-1295.98,-837.66
T2_CS*: H3.8 T2_CS.1 U4.47 U6.6 | length 3042
  Top Layer w11.81: v1(-1340,645) -1340,600 -1140,400 -1140,356 v1(-1115,331) -676,770 -192.41,770 -46.26,623.85 U4.47 ; U6.6 -1233.58,-409.06 -1202.52,-378 T2_CS.1
  Bottom Layer w11.81: H3.8 -1435,545 -1340,640 v1(-1340,645) ; T2_CS.1 -1115,-318 v1(-1115,331)
T3_CS*: H3.9 T3_CS.1 U4.45 | length 2023.9
  Top Layer w11.81: T3_CS.1 -1235,595 -965,595 -735,825 -190,825 -6.89,641.89 U4.45
  Bottom Layer w11.81: H3.9 -1620,495 -1375,495 T3_CS.1
T4_CS*: H3.7 T4_CS.1 U4.41 | length 2241.3
  Top Layer w11.81: T4_CS.1 -1300,895 -44.61,895 71.85,778.54 U4.41
  Bottom Layer w11.81: H3.7 -1620,595 -1500,595 -1385,710 T4_CS.1
USB_5V: D1.1 L1.1 | length 1035
  Top Layer w19.68: L1.1 -1355,330 -1203,178 -1120,178 -1032,90 -527.68,90 D1.1@-477.68,140
USB_DM: R12.2 U4.4 | length 497.3
  Top Layer w11.81: R12.2@-532.6,340 -490,340 -475,355 -475,377 -387,465 -240,465 -193.72,418.72 U4.4
USB_DMB: H3.3 R12.1 | length 1483.5
  Top Layer w11.81: H3.3 -1665,745 -1615,795 -1520,795 -1420,695 -1420,610 -1265,455 -1265,320 -1185,240 -945,240 -866.1,318.9 -628.5,318.9 R12.1@-607.4,340
USB_DP: R13.2 U4.3 | length 457.7
  Top Layer w11.81: R13.2@-532.6,425 -467,425 -407,485 -230,485 -183.41,438.41 U4.3
USB_DPB: H3.2 R13.1 | length 1396.7
  Top Layer w11.81: H3.2 -1525,845 -1395,715 -1395,620 -1240,465 -1240,330 -1170,260 -960,260 -870,350 -687.64,350 -640,397.64 R13.1@-607.4,397.64
USB_GND: H3.1 L3.2 | length 164
  Top Layer w19.68: H3.1 L3.2@-1670,1009
VADC: C8.2 C11.2 L2.2 U5.4 U6.4 | length 870.6
  Top Layer w20: L2.2 -1517.4,-627.6 -1479.74,-665.26 C11.2 -903.32,-665.26 -883.58,-685 U5.4 ; U6.4 -1183.58,-665
VMAINS: C17.2 D2.3 R8.1 U4.40 Vmains.1 | length 2303.9
  Top Layer w11.81: R8.1 v1(-479,-734) C17.2 ; -359.72,685 Vmains.1 ; U4.40 91.54,642.72 v1(118.11,669.29)
  Bottom Layer w11.81: v1(-479,-734) -479,-514.19 -488.19,-505 -488.19,98.43 -244.09,342.52 -244.09,634.09 Vmains.1 -220,685 -204.29,669.29 v1(118.11,669.29)
VREF: U4.13
XTAL: U4.25 Y1.3 | length 124.8
  Top Layer w11.81: U4.25 273.76,261.24 Y1.3@312.5,222.5
XTAL32: U4.14
pads on no net: LCD1.0 LCD1.3 LCD1.7 LCD1.8 LCD1.9 LCD1.10 LCD1.11 LCD1.12 LCD1.13 LCD1.14 LCD1.16 LCD1.17 LCD1.18 LCD1.21 LCD1.22 LCD1.23 LCD1.24 U3.12 U5.8 U6.8

## Polygon pours and split planes (outlines as drawn)
GND on Top Layer "Top Layer-No Net" (solid, remove dead copper, pour order 4): 1837,-1381 -1822.68,-1381 -1822.68,1378.78 1837,1378.78
GND on Bottom Layer "Top Layer-No Net" (solid, remove dead copper, pour order 3): 1837.32,-1390.49 -1837.68,-1390.49 -1837.68,1374.51 1837.32,1374.51

## Keep-outs
Top Layer:
  rectangle: -665,-300 -546,-250
  rectangle: -1817,-1364 -1583,-1130.8
  rectangle: -1817,1130.8 -1583,1364
  region: 1817,1364 1583,1364 1583,1130.8 1817,1130.8
  region: 1817,-1130.8 1583,-1130.8 1583,-1364 1817,-1364
Bottom Layer:
  rectangle: -665,-300 -546,-249
  rectangle: -1817,1130.8 -1583,1364
  rectangle: -1817,-1364 -1583,-1130.8
  region: 1817,-1130.8 1583,-1130.8 1583,-1364 1817,-1364
  region: 1817,1364 1583,1364 1583,1130.8 1817,1130.8
Keep-Out Layer:
  the board outline again, w10

## Other copper
Top Layer:
  region net 3V3: 152.32,259.51 152.32,479.51 -67.68,479.51 -67.68,259.51
  rectangle net GND: 210,-1110 535,-1055
  rectangle net GND: 340,-1255 400,-925

## Silkscreen, mask and mechanical layers (free items; w line width, h text height)
Top Overlay:
  text "LCD Module" at -720.47,1161.42 h50
  text ".ProjectRevision" at -355,960 h50
  text "T962a Oven Controller" at -1405,955 h50
  text "LEDs" at 1585,510 h50 r90
  text "Expansion" at -1450,325 h50 r90
  text "Spare" at 1150,100 h50
  text "+12V" at 1195,-90 h50
  text "Gnd" at -230,-230 h40 r90
  text "3v3" at -130,-230 h40 r90
  text "Rx" at -30,-230 h40 r90
  text "Tx" at 70,-230 h40 r90
  text "Case" at 1185,-260 h50
  text "Fan" at 1185,-345 h50
  text "+12V" at 1195,-510 h50
  text "Buttons" at -1563,-530 h50 r90
  text "+12V" at 810,-920 h50 r90
  text "Oven Fan" at 1030,-920 h50 r90
  text "+12V" at 1220,-920 h50 r90
  text "Heater" at 1440,-920 h50 r90
  text "TH1" at -685,-940 h50 r90
  text "TH2" at -1490,-945 h50 r90
  text "N" at -1417.32,-944.88 h50
  text "P" at -1220.47,-944.88 h50
  text "N" at -1023.62,-944.88 h50
  text "P" at -846.46,-944.88 h50
  text "9Vac" at -464.88,-1200.79 h50 r90
  text "SSRs" at 1570.87,-1287.4 h50 r90
  text "Thermal isolation slot" at -585,-1365 h50 r90

## Text inside footprints (layer, text, board x,y; h text height)
BR1: Top Overlay "-" at -305,-543.26 h30; Top Overlay "+" at -105,-543.26 h30; Top Overlay "~" at -115,-725.11 h30 r335; Top Overlay "~" at -315,-725.11 h30 r335
LCD1: Bottom Overlay "20" at -1318.9,1200.79 h50 r180; Bottom Overlay "1" at 610.24,1200.79 h50 r180
Logo1: Top Overlay "OSHW" at 1160,770 h60; Top Overlay "o" at 1425,595 h800